# EAGLE board Top_Board (EAGLE 6.5.0)
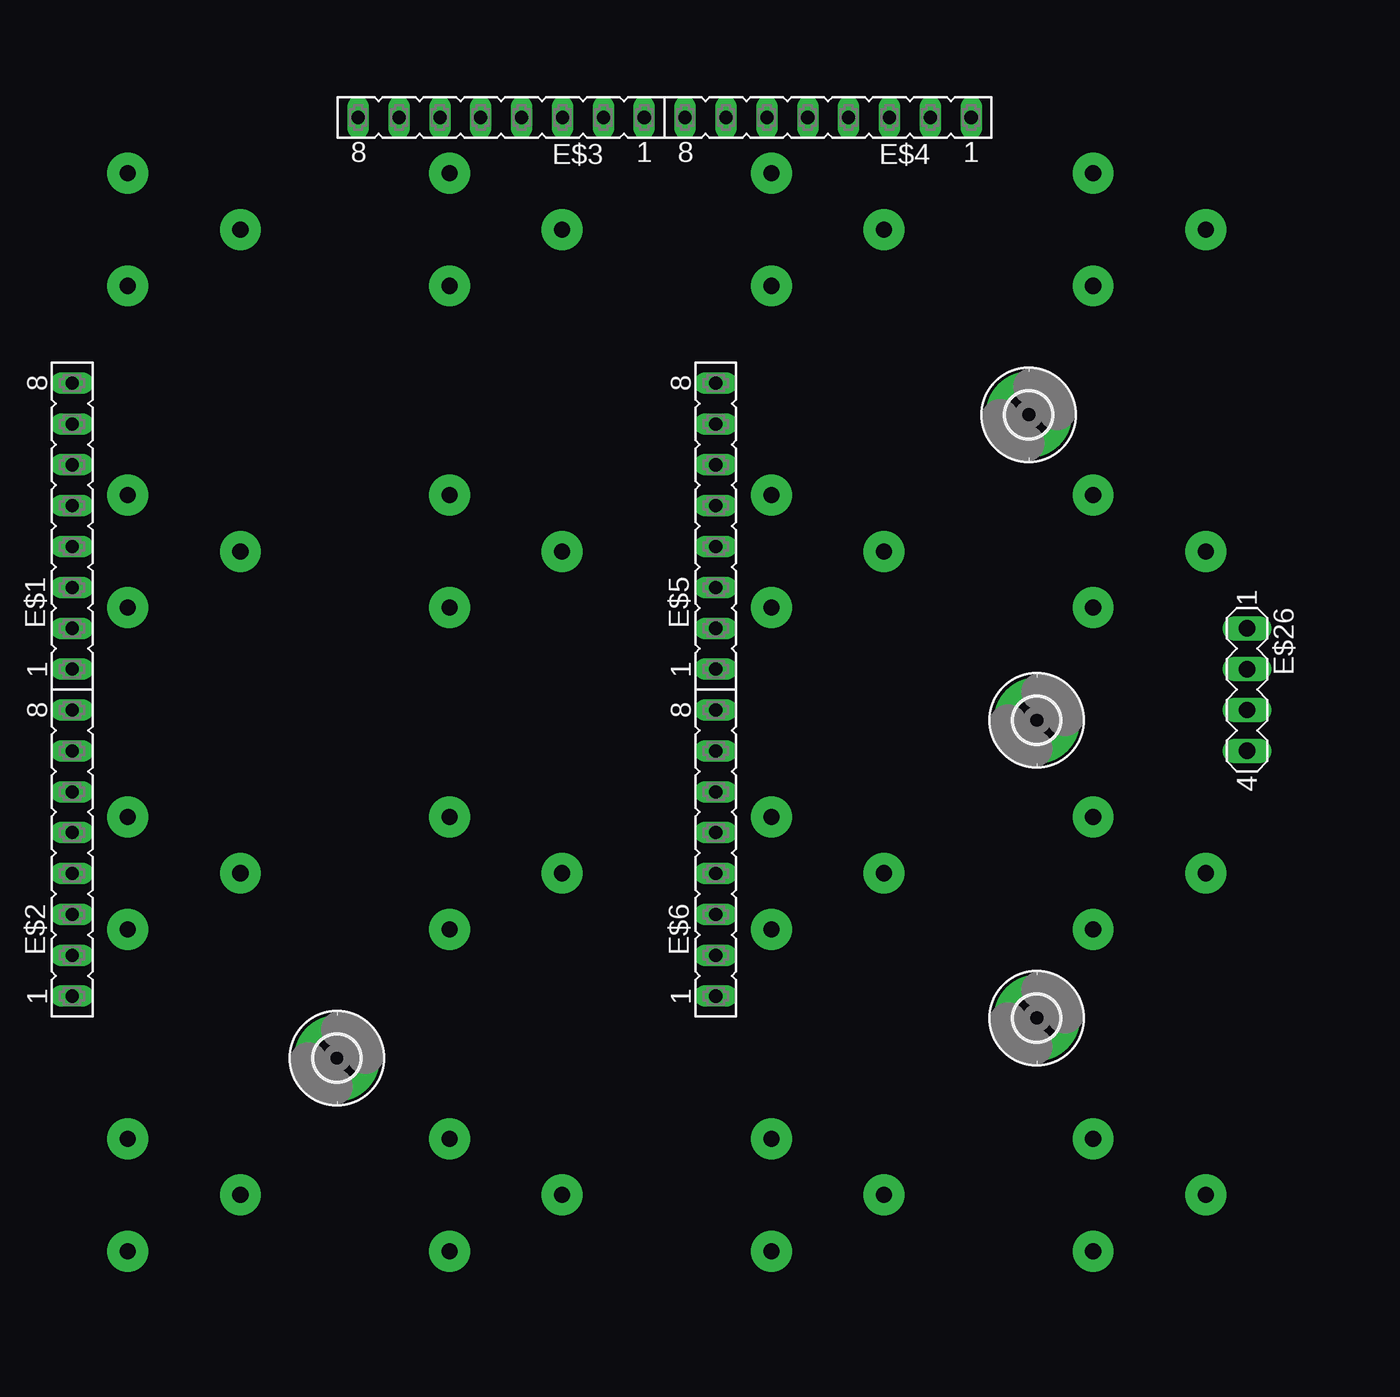
[diagram p0: board, top side]
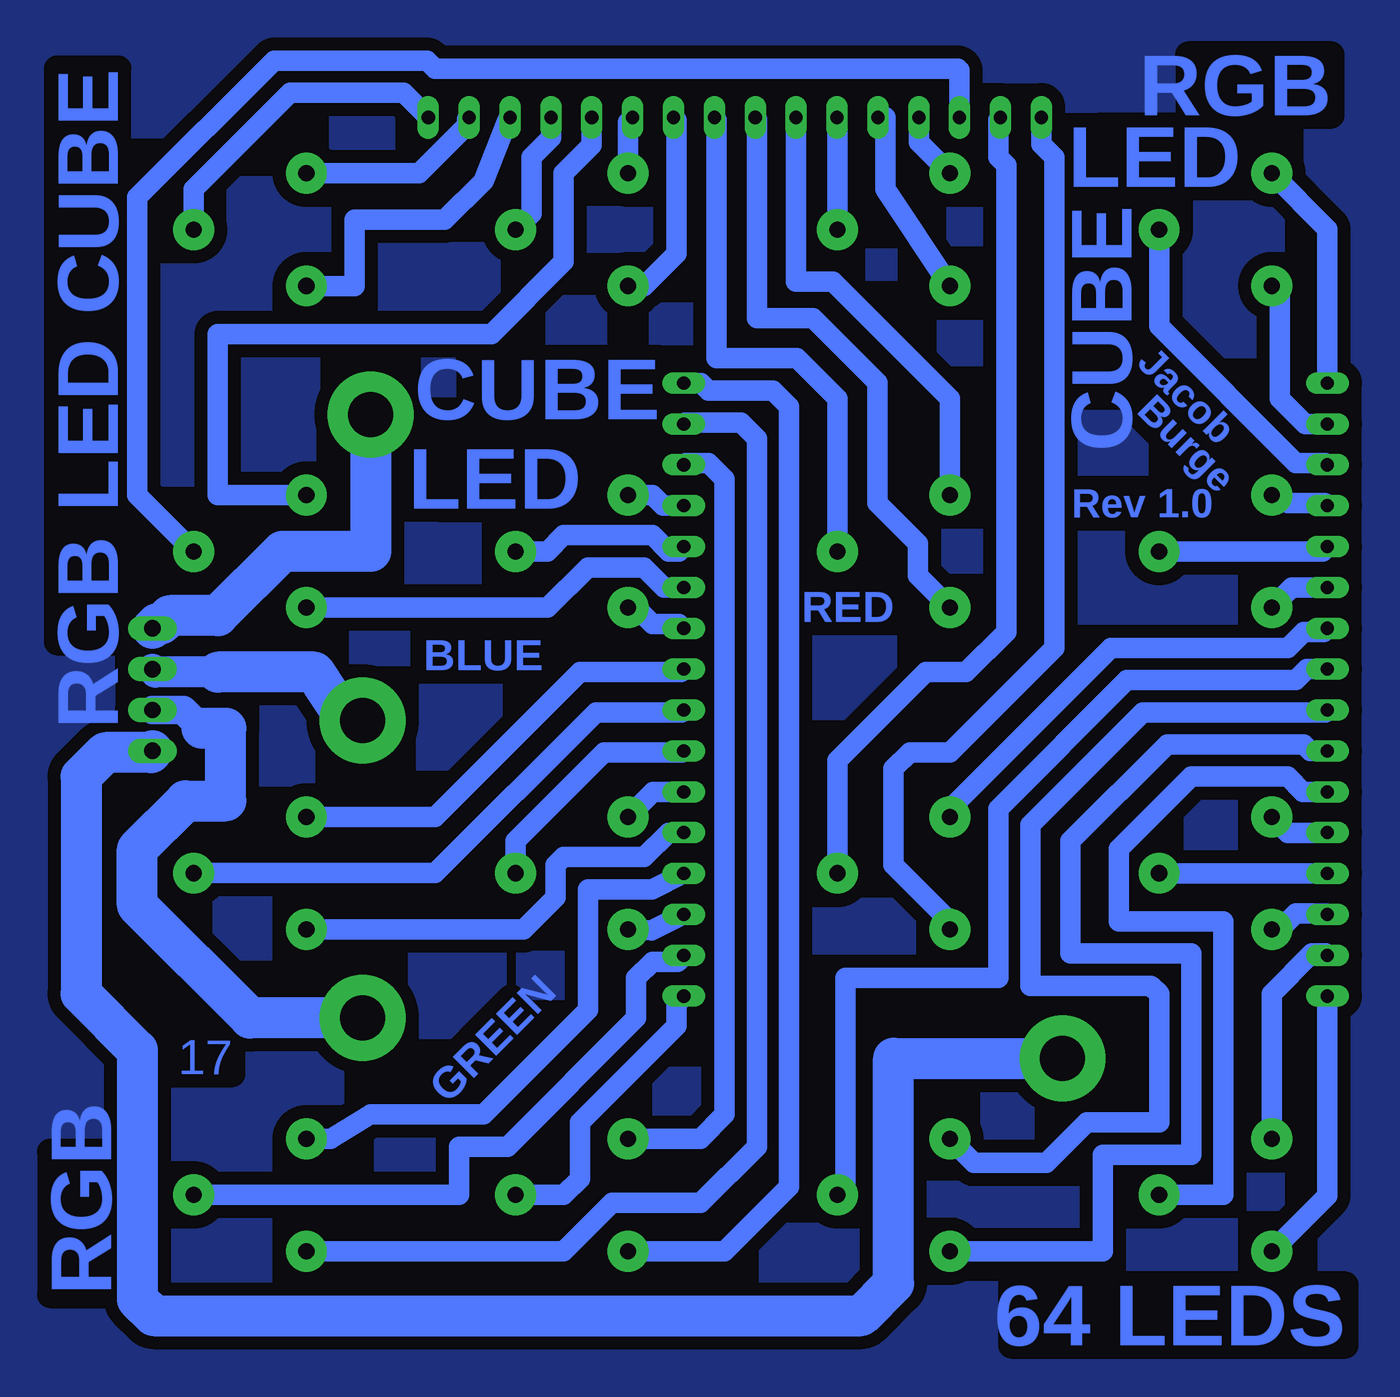
[diagram p1: board, bottom side, seen from below]

No outline drawn. Coordinates in mm, seen from the top.
Copper layers (1*16): Top 0.035mm / dielectric 1.5mm / Bottom 0.035mm
Design rules "default": minimum track width 10mil, minimum drill 24mil, track to track 8mil, track to pad 8mil, pad to pad 8mil, via to via 8mil, smd to smd 8mil, copper to edge 40mil, drill to drill 8mil, minimum pad ring 10mil, minimum via ring 8mil, stop-mask expansion 4mil, vias tented up to drill 0mil, thermal gap 10mil

## Footprints (pad centres in the part's own frame; a part is rotated, then mirrored left to right if it is on the bottom)
FE08 = drill 0.813 long: 1 -8.89,0; 2 -6.35,0; 3 -3.81,0; 4 -1.27,0; 5 1.27,0; 6 3.81,0; 7 6.35,0; 8 8.89,0
2,8-PAD = drill 2.8 pad 5.334: B2,8 0,0
RGB_LED = drill 1 pad 2.54: P$1 0,0; P$2 0,7; P$3 7,3.5
MA04-1 = drill 1.016 long: 1 -3.81,0; 2 -1.27,0; 3 1.27,0; 4 3.81,0

## Placement (x,y rotation side)
E$1  [FE08]  2.54,52.07 90 top
E$2  [FE08]  2.54,31.75 90 top
E$3  [FE08]  29.21,77.47 180 top
E$4  [FE08]  49.53,77.47 180 top
E$5  [FE08]  42.55,52.07 90 top
E$6  [FE08]  42.55,31.75 90 top
E$7  [2,8-PAD]  62,59 0 top
E$8  [RGB_LED]  6,67 0 top
E$9  [2,8-PAD]  62.5,21.5 0 top
E$10  [2,8-PAD]  62.5,40 0 top
E$11  [RGB_LED]  6,47 0 top
E$12  [RGB_LED]  26,67 0 top
E$13  [RGB_LED]  6,27 0 top
E$14  [RGB_LED]  26,47 0 top
E$15  [RGB_LED]  46,67 0 top
E$16  [RGB_LED]  66,67 0 top
E$17  [RGB_LED]  46,47 0 top
E$18  [RGB_LED]  66,47 0 top
E$19  [RGB_LED]  26,27 0 top
E$20  [RGB_LED]  46,27 0 top
E$21  [RGB_LED]  66,27 0 top
E$22  [RGB_LED]  6,7 0 top
E$23  [RGB_LED]  26,7 0 top
E$24  [RGB_LED]  46,7 0 top
E$25  [RGB_LED]  66,7 0 top
E$26  [MA04-1]  75.56,41.91 270 top
E$27  [2,8-PAD]  19,19 0 top

## Library data of the parts
E$1-E$6 = con-lsta
E$7 E$9 E$10 E$27 = holes
E$8 E$11-E$25 = RGB LED
E$26 = con-lstb

## Nets
S$12: E$1.5 E$11.P$2
S$41: E$1.6 E$8.P$3
S$42: E$1.7 E$8.P$1
S$43: E$1.8 E$8.P$2
S$44: E$3.5 E$12.P$2
S$45: E$3.4 E$12.P$1
S$46: E$3.3 E$12.P$3
S$47: E$3.2 E$14.P$2
S$48: E$3.1 E$14.P$1
S$49: E$4.8 E$14.P$3
S$50: E$4.6 E$15.P$2
S$51: E$4.7 E$15.P$1
S$53: E$4.4 E$15.P$3
S$54: E$4.3 E$16.P$1
S$55: E$4.2 E$16.P$2
S$56: E$4.1 E$16.P$3
S$57: E$1.4 E$11.P$3
S$58: E$1.3 E$11.P$1
S$59: E$2.5 E$13.P$2
S$60: E$2.4 E$13.P$3
S$61: E$2.3 E$13.P$1
S$62: E$2.7 E$23.P$1
S$63: E$2.8 E$23.P$2
S$64: E$1.1 E$23.P$3
S$65: E$1.2 E$19.P$2
S$66: E$3.7 E$19.P$3
S$67: E$2.1 E$22.P$1
S$68: E$2.2 E$22.P$2
S$69: E$2.6 E$22.P$3
S$70: E$3.8 E$19.P$1
S$71: E$3.6 E$18.P$3
S$73: E$4.5 E$18.P$2
S$74: E$5.8 E$24.P$1
S$76: E$5.6 E$24.P$2
S$77: E$5.7 E$25.P$1
S$78: E$5.5 E$17.P$2
S$79: E$5.2 E$17.P$1
S$80: E$5.4 E$17.P$3
S$81: E$5.3 E$18.P$1
S$82: E$6.6 E$20.P$2
S$83: E$6.4 E$25.P$2
S$84: E$6.7 E$20.P$3
S$85: E$6.3 E$20.P$1
S$86: E$6.2 E$25.P$3
S$87: E$6.1 E$24.P$3
S$88: E$6.5 E$21.P$1
S$89: E$6.8 E$21.P$3
S$90: E$26.4 E$27.B2,8
S$91: E$5.1 E$21.P$2
S$92: E$9.B2,8 E$26.3
S$93: E$10.B2,8 E$26.2
S$107: E$7.B2,8 E$26.1

## Tracks (layer width: path | path; a pad name or v marks a point on that pad's centre or on a via)
S$1  (via drill 1 pad 2.18)
  other vias: 6,74
S$3  (via drill 1 pad 2.18)
  other vias: 6,54
S$4  (via drill 1 pad 2.18)
  other vias: 6,34
S$5  (via drill 1 pad 2.18)
  other vias: 6,34
S$6  (via drill 1 pad 2.18)
  other vias: 26,7
S$7  (via drill 1 pad 2.18)
  other vias: 6,54
S$8  (via drill 1 pad 2.18)
  other vias: 6,34
S$9  (via drill 1 pad 2.18)
  other vias: 6,14
S$10  (via drill 1 pad 2.18)
  other vias: 46,7
S$11  (via drill 1 pad 2.18)
  other vias: 26,7
S$12
  Bottom 1.27: E$11.P$2 5.5,54 5,53.5 2.7,53.5 E$1.5
S$13  (via drill 1 pad 2.18)
  other vias: 46,7
S$14  (via drill 1 pad 2.18)
  other vias: 26,74
S$15  (via drill 1 pad 2.18)
  other vias: 26,54
S$16  (via drill 1 pad 2.18)
  other vias: 26,54
S$17  (via drill 1 pad 2.18)
  other vias: 26,34
S$18  (via drill 1 pad 2.18)
  other vias: 26,34
S$19  (via drill 1 pad 2.18)
  other vias: 26,14
S$20  (via drill 1 pad 2.18)
  other vias: 26,54
S$21  (via drill 1 pad 2.18)
  other vias: 26,34
S$22  (via drill 1 pad 2.18)
  other vias: 26,14
S$23  (via drill 1 pad 2.18)
  other vias: 46,74
S$24  (via drill 1 pad 2.18)
  other vias: 46,54
S$25  (via drill 1 pad 2.18)
  other vias: 46,54
S$26  (via drill 1 pad 2.18)
  other vias: 46,34
S$27  (via drill 1 pad 2.18)
  other vias: 46,34
S$28  (via drill 1 pad 2.18)
  other vias: 73,10.5
S$29  (via drill 1 pad 2.18)
  other vias: 46,54
S$30  (via drill 1 pad 2.18)
  other vias: 46,34
S$31  (via drill 1 pad 2.18)
  other vias: 46,14
S$32  (via drill 1 pad 2.18)
  other vias: 66,74
S$33  (via drill 1 pad 2.18)
  other vias: 66,54
S$34  (via drill 1 pad 2.18)
  other vias: 66,54
S$35  (via drill 1 pad 2.18)
  other vias: 26,7
S$36  (via drill 1 pad 2.18)
  other vias: 66,34
S$37  (via drill 1 pad 2.18)
  other vias: 66,14
S$38  (via drill 1 pad 2.18)
  other vias: 66,54
S$39  (via drill 1 pad 2.18)
  other vias: 66,34
S$40  (via drill 1 pad 2.18)
  other vias: 66,14
S$41
  Bottom 1.27: E$8.P$3 13,64.5 4.5,56 2.66,56 E$1.6
S$42
  Bottom 1.27: E$1.7 3.92,58.42 5.5,60 5.5,66.5 E$8.P$1
S$43
  Bottom 1.27: E$1.8 2.54,70.54 E$8.P$2
S$44
  Bottom 1.27: E$12.P$2 27.94,75.94 E$3.5
S$45
  Bottom 1.27: E$12.P$1 30,73 30,77.47 E$3.4
S$46
  Bottom 1.27: E$12.P$3 33,77.47 E$3.3
S$47
  Bottom 1.27: E$3.2 35.56,67.27 33.27,67.27 26,60 E$14.P$2
S$48
  Bottom 1.27: E$14.P$1 28,49 28,51 30.5,53.5 30.5,61 34.5,65 38,65 38,77.37 E$3.1
S$49
  Bottom 1.27: E$14.P$3 33,60 35.5,62.5 40.5,62.5 40.5,77.33 E$4.8
S$50
  Bottom 1.27: E$15.P$2 46,77.19 E$4.6
S$51
  Bottom 1.27: E$15.P$1 45,67 43,69 43,77.29 E$4.7
S$53
  Bottom 1.27: E$4.4 50.8,76.2 52,75 52,71.5 E$15.P$3
S$54
  Bottom 1.27: E$16.P$1 63,67 63,71.12 57.42,71.12 55,73.5 53.5,77.31 E$4.3
S$55
  Bottom 1.27: E$16.P$2 59,74 56,77 56,77.35 E$4.2
S$56
  Bottom 1.27: E$16.P$3 73,73 67,79 59.95,79 E$4.1
S$57
  Bottom 1.27: E$11.P$3 2.84,50.5 E$1.4
S$58
  Bottom 1.27: E$1.3 4.74,48.26 E$11.P$1
S$59
  Bottom 1.27: E$13.P$2 5,33 2.56,33 E$2.5
S$60
  Bottom 1.27: E$2.4 12.98,30.48 E$13.P$3
S$61
  Bottom 1.27: E$13.P$1 5.5,27 4.5,28 2.6,28 E$2.3
S$62
  Bottom 1.27: E$2.7 3.6,38.1 4,38.5 12.5,38.5 18.5,32.5 18.5,25.5 11,25.5 11,13 16.5,13 16.5,7 E$23.P$1
S$63
  Bottom 1.27: E$23.P$2 24.5,12.5 20,12.5 17.5,15 13,15 13,23 13.5,23.5 21,23.5 21,33.5 14,40.5 2.68,40.5 E$2.8
S$64
  Bottom 1.27: E$1.1 3.82,43.18 4.5,42.5 15,42.5 23,34.5 23,24 32.5,24 32.5,11 E$23.P$3
S$65
  Bottom 1.27: E$19.P$2 26,34.5 16,44.5 5,44.5 4,45.5 2.76,45.5 E$1.2
S$66
  Bottom 1.27: E$19.P$3 33,37.5 27.5,43 25,43 22.5,45.5 22.5,74.5 23,75 23,77.33 E$3.7
S$67
  Bottom 1.27: E$2.1 2.54,10.46 E$22.P$1
S$68
  Bottom 1.27: E$22.P$2 6,23 3.5,25.5 2.64,25.5 E$2.2
S$69
  Bottom 1.27: E$2.6 4.06,35.56 5,36.5 11,36.5 15.5,32 15.5,27.5 9,27.5 9,10.5 E$22.P$3
S$70
  Bottom 1.27: E$3.8 20.32,75.82 19.5,75 19.5,44.5 26,38 28.5,38 29.5,37 29.5,31 26,27.5 E$19.P$1
S$71
  Bottom 1.27: E$3.6 25.4,80.4 25.5,80.5 58,80.5 58.5,81 68,81 76.5,72.5 76.5,54 E$18.P$3
S$73
  Bottom 1.27: E$4.5 48.26,75.74 50,74 50,68.5 54.5,64 71.5,64 71.5,54 E$18.P$2
S$74
  Bottom 1.27: E$5.8 41.46,60.96 41,60.5 37,60.5 36,59.5 36,11 40,7 E$24.P$1
S$76
  Bottom 1.27: E$24.P$2 41.5,14 40,15.5 40,55 41,56 42.42,56 E$5.6
S$77
  Bottom 1.27: E$5.7 42.47,58.5 39,58.5 38,57.5 38,13.5 41.5,10 47,10 50,7 E$25.P$1
S$78
  Bottom 1.27: E$5.5 43.84,53.34 44.5,54 E$17.P$2
S$79
  Bottom 1.27: E$17.P$1 45.5,47 44.5,46 42.83,46 E$5.2
S$80
  Bottom 1.27: E$17.P$3 51,50.5 50,51.5 44.5,51.5 43.5,50.5 42.84,50.5 E$5.4
S$81
  Bottom 1.27: E$5.3 43.76,48.26 45,49.5 48.5,49.5 51,47 E$18.P$1
S$82
  Bottom 1.27: E$6.6 44.44,35.56 E$20.P$2
S$83
  Bottom 1.27: E$6.4 44.52,29.48 48.5,29.5 48.5,22 55,15.5 62,15.5 64.5,14 E$25.P$2
S$84
  Bottom 1.27: E$20.P$3 53,32.5 47.5,38 42.65,38 E$6.7
S$85
  Bottom 1.27: E$6.3 44.56,26.94 E$20.P$1
S$86
  Bottom 1.27: E$25.P$3 56.5,10.5 56.5,13.5 53.5,13.5 45.5,21.5 45.5,24 44.5,25 42.95,25 E$6.2
S$87
  Bottom 1.27: E$24.P$3 50,10.5 49,11.5 49,15 43,21 43,22.41 E$6.1
S$88
  Bottom 1.27: E$21.P$1 52.5,27 50.5,29 50.5,31 50,31.5 45,31.5 43.5,33 42.56,33 E$6.5
S$89
  Bottom 1.27: E$21.P$3 58,30.5 48,40.5 42.69,40.5 E$6.8
S$90
  Bottom 2.54: E$26.4 75.67,38 78.5,38 80,36.5 80,23 76.5,19.5 76.5,4 75.5,3 31.5,3 29.5,5 29.5,19 E$27.B2,8
S$91
  Bottom 1.27: E$5.1 42.73,43 49,43 58,34 E$21.P$2
S$92
  Bottom 1.778: 72.5,39.5 73.64,40.64 E$26.3
  Bottom 2.54: E$9.B2,8 69.5,21.5 76.5,28.5 76.5,32 73.5,35 71,35 71,39.5 72.5,39.5
S$93
  Bottom 1.93: 71.5,43 75.39,43 E$26.2
  Bottom 2.54: E$10.B2,8 63.5,40 65.5,43 71.5,43
S$94  (via drill 1 pad 2.18)
  other vias: 46,7
S$95  (via drill 1 pad 2.18)
  other vias: 13,70.5
S$96  (via drill 1 pad 2.18)
  other vias: 6,67
S$97  (via drill 1 pad 2.18)
  other vias: 33,70.5
S$98  (via drill 1 pad 2.18)
  other vias: 26,67
S$99  (via drill 1 pad 2.18)
  other vias: 53,70.5
S$100  (via drill 1 pad 2.18)
  other vias: 46,67
S$101  (via drill 1 pad 2.18)
  other vias: 73,70.5
S$102  (via drill 1 pad 2.18)
  other vias: 66,67
S$103  (via drill 1 pad 2.18)
  other vias: 13,50.5
S$104  (via drill 1 pad 2.18)
  other vias: 6,47
S$105  (via drill 1 pad 2.18)
  other vias: 33,50.5
S$106  (via drill 1 pad 2.18)
  other vias: 26,47
S$107
  Bottom 2.54: E$7.B2,8 62,50.5 67.5,50.5 71.5,46.5 74.5,46.5 75,46 75.28,46 E$26.1
S$108  (via drill 1 pad 2.18)
  other vias: 73,50.5
S$109  (via drill 1 pad 2.18)
  other vias: 66,47
S$110  (via drill 1 pad 2.18)
  other vias: 66,47
S$111  (via drill 1 pad 2.18)
  other vias: 26,47
S$112  (via drill 1 pad 2.18)
  other vias: 6,47
S$113  (via drill 1 pad 2.18)
  other vias: 46,47
S$114  (via drill 1 pad 2.18)
  other vias: 46,47
S$115  (via drill 1 pad 2.18)
  other vias: 53,30.5
S$116  (via drill 1 pad 2.18)
  other vias: 46,27
S$117  (via drill 1 pad 2.18)
  other vias: 46,27
S$118  (via drill 1 pad 2.18)
  other vias: 33,30.5
S$119  (via drill 1 pad 2.18)
  other vias: 26,27
S$120
  pour Bottom (isolate 0.813): -2,84 -2,-2 84,-2 84.5,-1.5 84.5,84
S$121  (via drill 1 pad 2.18)
  other vias: 13,30.5
S$122  (via drill 1 pad 2.18)
  other vias: 6,27
S$123  (via drill 1 pad 2.18)
  other vias: 6,27
S$124  (via drill 1 pad 2.18)
  other vias: 13,10.5
S$125  (via drill 1 pad 2.18)
  other vias: 6,7
S$126  (via drill 1 pad 2.18)
  other vias: 6,14
S$127  (via drill 1 pad 2.18)
  other vias: 6,7
S$128  (via drill 1 pad 2.18)
  other vias: 26,7
S$129  (via drill 1 pad 2.18)
  other vias: 33,10.5
S$130  (via drill 1 pad 2.18)
  other vias: 26,7
S$131  (via drill 1 pad 2.18)
  other vias: 53,10.5
S$132  (via drill 1 pad 2.18)
  other vias: 46,7
S$133  (via drill 1 pad 2.18)
  other vias: 46,7
S$134  (via drill 1 pad 2.18)
  other vias: 66,7
S$135  (via drill 1 pad 2.18)
  other vias: 66,7
S$136  (via drill 1 pad 2.18)
  other vias: 73,30.5
S$137  (via drill 1 pad 2.18)
  other vias: 66,27
S$138  (via drill 1 pad 2.18)
  other vias: 66,27

## Text on the board
Bottom: RGB | RGB LED CUBE | LED | CUBE | Jacob | CUBE | Burge | LED | Rev 1.0 | RED | BLUE | 17 | GREEN | 64 LEDS | RGB